# EAGLE board SampleHolder5oa (EAGLE 5.10)
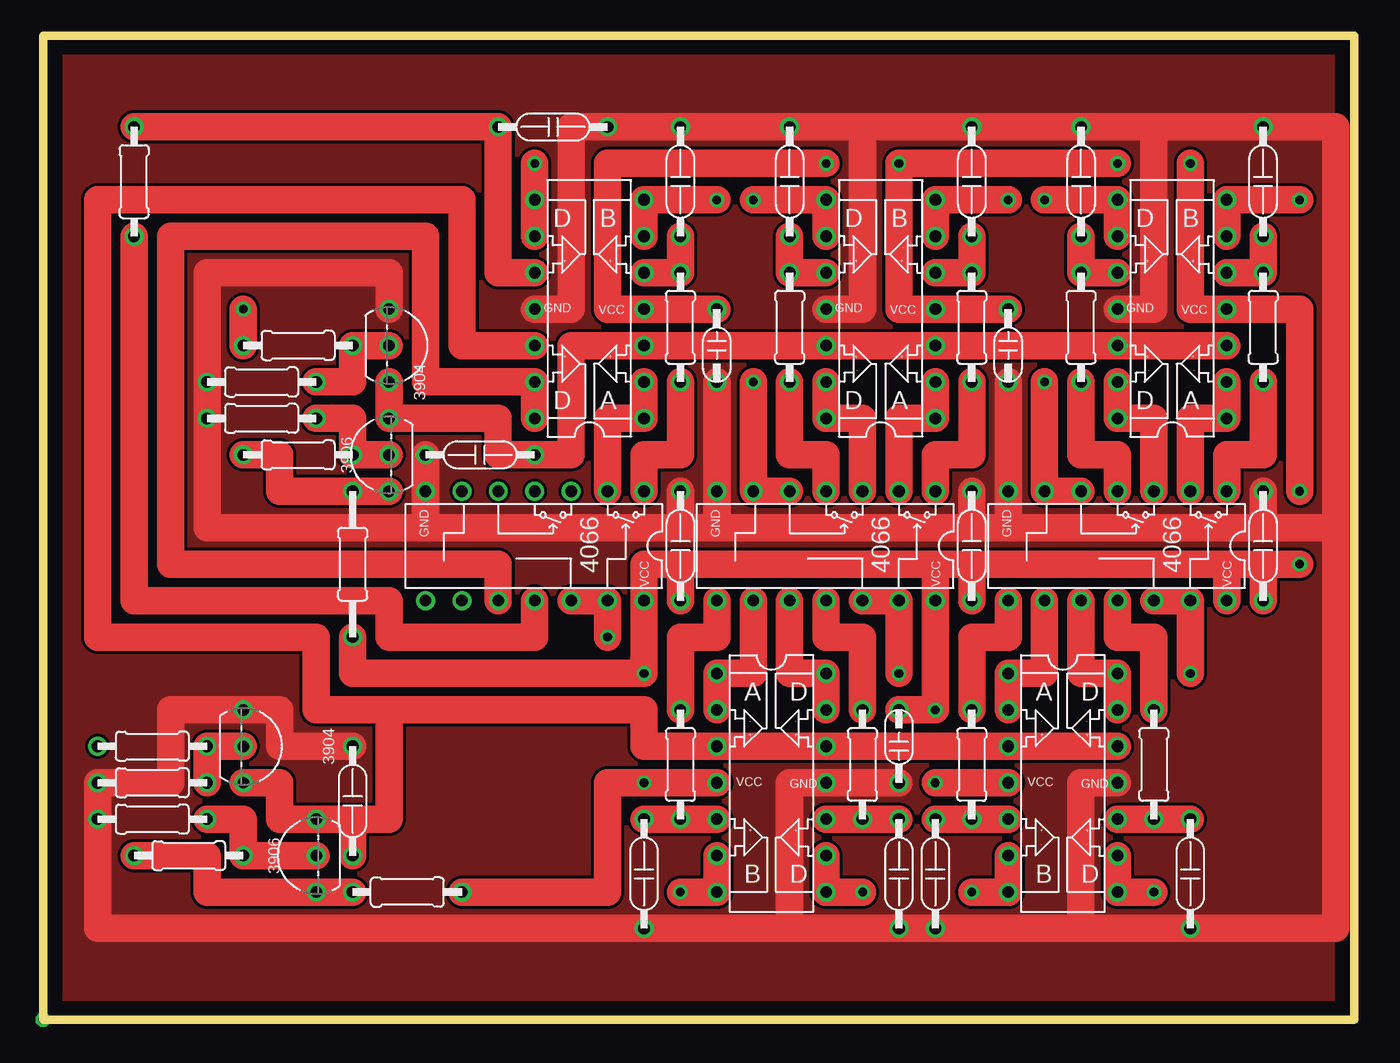
[diagram p0: board, top side]
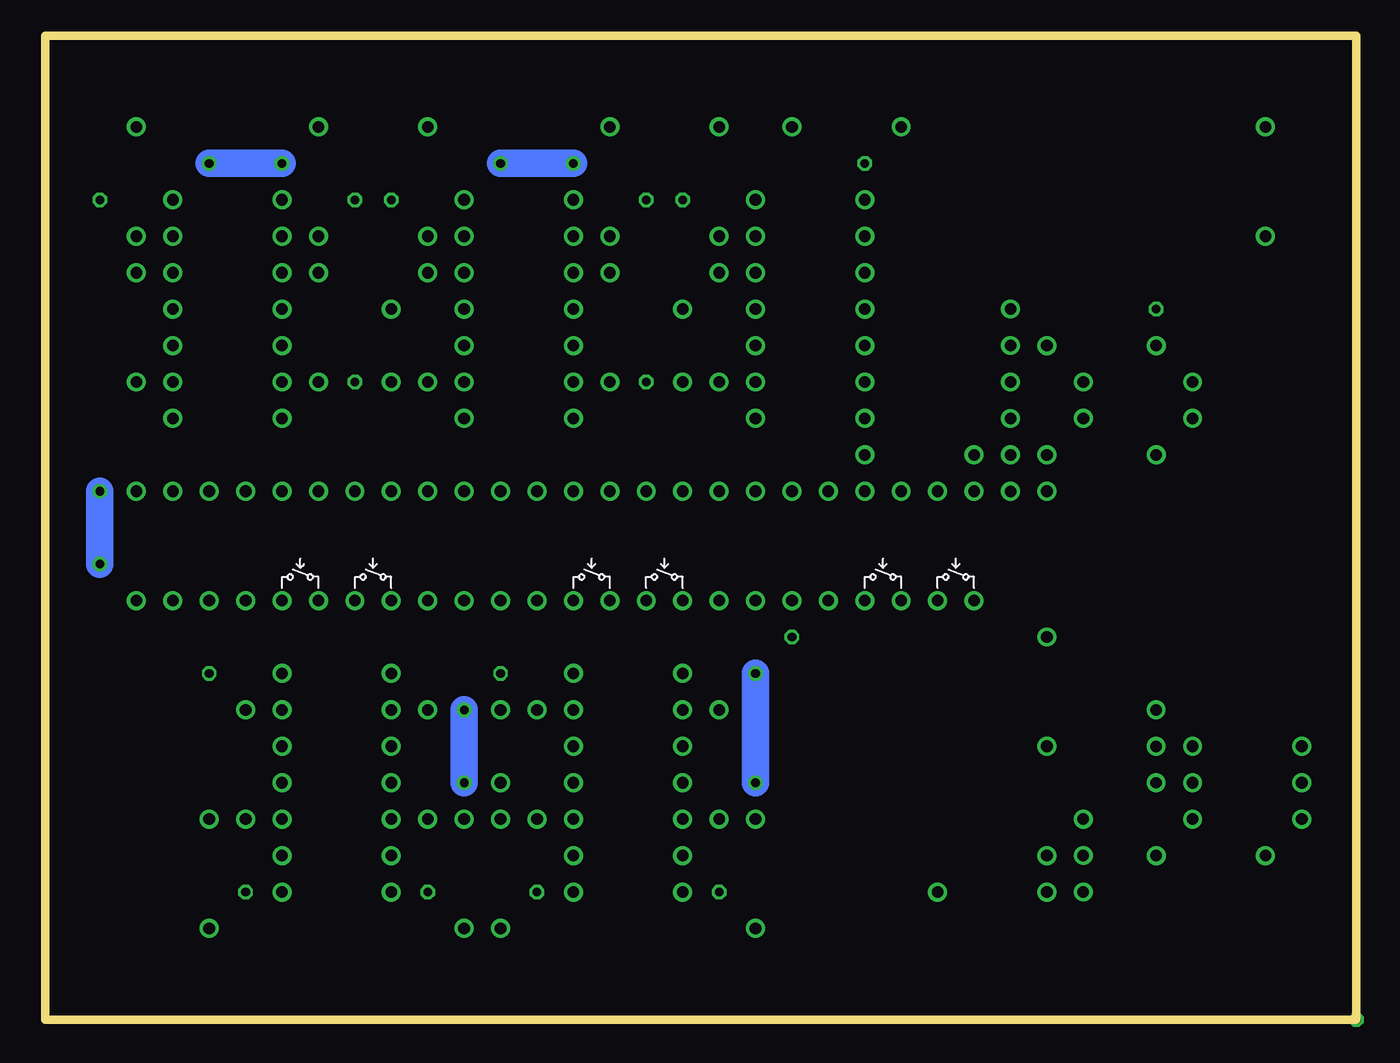
[diagram p1: board, bottom side, seen from below]

Size 91.44 x 68.58 mm. Coordinates in mm from the lower left corner, seen from the top.
Outline: 0,68.58 0,0 91.44,0 91.44,68.58 0,68.58
Copper layers (1*16): Top 0.035mm / dielectric 1.5mm / Bottom 0.035mm
Design rules "default": minimum track width 10mil, minimum drill 24mil, track to track 8mil, track to pad 8mil, pad to pad 8mil, via to via 8mil, smd to smd 8mil, copper to edge 40mil, drill to drill 8mil, minimum pad ring 10mil, minimum via ring 8mil, stop-mask expansion 4mil, vias tented up to drill 0mil, thermal gap 10mil

## Footprints (pad centres in the part's own frame; a part is rotated, then mirrored left to right if it is on the bottom)
SMALL-CAPACITOR = drill 0.813 round: IN1 0,0; IN2 5.08,0
RESISTOR = drill 0.813 round: IN1 -3.81,0; IN2 3.81,0
TRANSISTOR = drill 0.8 round: P$1 0,0; P$2 2.54,0; P$3 -2.54,0
LM324-QUAD-OPAMP = drill 0.813 round: AMINUS -3.81,5.08; AOUT -3.81,7.62; APLUS -3.81,2.54; BMINUS -3.81,-5.08; BOUT -3.81,-7.62; BPLUS -3.81,-2.54; CMINUS 3.81,5.08; COUT 3.81,7.62; CPLUS 3.81,2.54; DMINUS 3.81,-5.08; DOUT 3.81,-7.62; DPLUS 3.81,-2.54; GND 3.81,0; VCC -3.81,0
CAPACITOR = drill 0.813 round: IN1 -2.54,0; IN2 5.08,0
4066-QUAD-SW = drill 0.813 round: A1 -3.81,7.62; A2 -3.81,2.54; A3 3.81,-5.08; A4 3.81,0; B1 -3.81,5.08; B2 -3.81,0; B3 3.81,-7.62; B4 3.81,-2.54; C1 3.81,5.08; C2 -3.81,-2.54; C3 -3.81,-5.08; C4 3.81,2.54; GND -3.81,-7.62; VCC 3.81,7.62
RESISTOR-L2 = drill 0.813 round: IN1 -5.08,0; IN2 5.08,0

## Placement (x,y rotation side)
E$1  [SMALL-CAPACITOR]  59.69,16.51 90 top
E$2  [RESISTOR]  6.35,58.42 270 top
E$3  [TRANSISTOR]  19.05,11.43 90 top
E$4  [TRANSISTOR]  13.97,19.05 270 top
E$5  [LM324-QUAD-OPAMP]  38.1,49.53 180 top
E$6  2k  [RESISTOR]  10.16,11.43 180 top
E$7  [RESISTOR]  44.45,48.26 270 top
E$8  10k  [RESISTOR]  7.62,13.97 180 top
E$9  [CAPACITOR]  44.45,57.15 90 top
E$10  [4066-QUAD-SW]  54.61,33.02 270 top
E$11  [LM324-QUAD-OPAMP]  50.8,16.51 0 top
E$12  [RESISTOR]  57.15,17.78 90 top
E$13  [RESISTOR]  44.45,17.78 90 top
E$14  [CAPACITOR]  59.69,11.43 270 top
E$15  [4066-QUAD-SW]  34.29,33.02 270 top
E$16  [CAPACITOR]  36.83,62.23 180 top
E$17  [CAPACITOR]  41.91,11.43 270 top
E$18  [LM324-QUAD-OPAMP]  58.42,49.53 180 top
E$19  [RESISTOR]  52.07,48.26 270 top
E$20  [RESISTOR]  64.77,48.26 270 top
E$21  [CAPACITOR]  52.07,57.15 90 top
E$22  [CAPACITOR]  64.77,57.15 90 top
E$23  [4066-QUAD-SW]  74.93,33.02 270 top
E$24  [LM324-QUAD-OPAMP]  71.12,16.51 0 top
E$25  [RESISTOR]  77.47,17.78 90 top
E$26  [RESISTOR]  64.77,17.78 90 top
E$27  [CAPACITOR]  80.01,11.43 270 top
E$28  [CAPACITOR]  62.23,11.43 270 top
E$29  [LM324-QUAD-OPAMP]  78.74,49.53 180 top
E$30  [RESISTOR]  72.39,48.26 270 top
E$31  [RESISTOR]  85.09,48.26 270 top
E$32  [CAPACITOR]  72.39,57.15 90 top
E$33  [CAPACITOR]  85.09,57.15 90 top
E$34  [CAPACITOR]  64.77,31.75 90 top
E$35  [CAPACITOR]  44.45,31.75 90 top
E$36  [CAPACITOR]  85.09,31.75 90 top
E$37  [SMALL-CAPACITOR]  46.99,49.53 270 top
E$38  [SMALL-CAPACITOR]  67.31,49.53 270 top
E$39  2k  [RESISTOR]  25.4,8.89 0 top
E$40  2k  [RESISTOR-L2]  21.59,31.75 270 top
E$41  10k  [RESISTOR]  7.62,19.05 180 top
E$42  10k  [RESISTOR]  7.62,16.51 180 top
E$43  [TRANSISTOR]  24.13,39.37 90 top
E$44  [TRANSISTOR]  24.13,46.99 270 top
E$45  2k  [RESISTOR]  17.78,39.37 180 top
E$46  10k  [RESISTOR]  15.24,41.91 180 top
E$48  [CAPACITOR]  29.21,39.37 0 top
E$49  10k  [RESISTOR]  17.78,46.99 180 top
E$50  10k  [RESISTOR]  15.24,44.45 180 top
E$51  [CAPACITOR]  21.59,13.97 90 top

## Library data of the parts
E$1-E$46 E$48-E$51 = RussellLibrary

## Nets
GND: E$1.IN1 E$4.P$3 E$5.GND E$8.IN2 E$9.IN2 E$10.GND E$11.GND E$14.IN2 E$15.GND E$16.IN1 E$17.IN2 E$18.GND E$21.IN2 E$22.IN2 E$23.GND E$24.GND E$27.IN2 E$28.IN2 E$29.GND E$32.IN2 E$33.IN2 E$34.IN2 E$35.IN2 E$36.IN2 E$37.IN2 E$38.IN2 E$42.IN2 E$44.P$3 E$46.IN2 E$48.IN1 E$50.IN2 E$51.IN2
S$1: E$2.IN1 E$5.DPLUS E$16.IN2
S$2: E$5.CMINUS E$5.COUT E$15.B4
S$3: E$49.IN2
S$4: E$3.P$1 E$6.IN1 E$8.IN1
S$5: E$2.IN2 E$15.A4
S$8: E$5.AMINUS E$5.AOUT
S$9: E$5.DMINUS E$5.DOUT
S$10: E$3.P$2 E$4.P$2 E$5.CPLUS E$11.APLUS E$11.CPLUS E$24.APLUS E$24.CPLUS E$51.IN1
S$11: E$7.IN2
S$12: E$4.P$1 E$41.IN1 E$42.IN1
S$13: E$3.P$3 E$6.IN2 E$39.IN1
S$14: E$41.IN2
S$15: E$5.BPLUS E$9.IN1
S$16: E$5.BMINUS E$5.BOUT
S$17: E$10.C2 E$10.C3
S$18: E$10.C1 E$10.C4
S$19: E$1.IN2 E$5.VCC E$10.VCC E$11.VCC E$15.VCC E$18.VCC E$23.VCC E$24.VCC E$29.VCC E$34.IN1 E$35.IN1 E$36.IN1 E$37.IN1 E$38.IN1 E$39.IN2
S$22: E$10.A3 E$11.AMINUS E$11.AOUT
S$23: E$10.B4 E$11.CMINUS E$11.COUT
S$24: E$11.BMINUS E$11.BOUT
S$26: E$10.B3 E$13.IN2
S$27: E$10.A4 E$12.IN2
S$28: E$11.DPLUS E$12.IN1 E$14.IN1
S$29: E$43.P$1 E$45.IN1 E$46.IN1
S$30: E$11.BPLUS E$17.IN1
S$31: E$5.APLUS E$18.APLUS E$18.CPLUS E$29.APLUS E$29.CPLUS E$43.P$2 E$44.P$2
S$32: E$24.BMINUS E$24.BOUT
S$33: E$18.AMINUS E$18.AOUT
S$34: E$18.CMINUS E$18.COUT
S$35: E$44.P$1 E$49.IN1 E$50.IN1
S$36: E$20.IN2
S$37: E$19.IN2
S$38: E$43.P$3 E$45.IN2
S$39: E$15.C1 E$15.C4
S$40: E$18.DPLUS E$19.IN1 E$21.IN1
S$41: E$18.DMINUS E$18.DOUT
S$44: E$18.BPLUS E$22.IN1
S$46: E$18.BMINUS E$18.BOUT
S$47: E$11.DMINUS E$11.DOUT
S$48: E$23.C2 E$23.C3
S$49: E$23.C1 E$23.C4
S$51: E$24.DMINUS E$24.DOUT
S$53: E$23.A3 E$24.AMINUS E$24.AOUT
S$54: E$23.B4 E$24.CMINUS E$24.COUT
S$56: E$23.B3 E$26.IN2
S$57: E$23.A4 E$25.IN2
S$60: E$24.DPLUS E$25.IN1 E$27.IN1
S$62: E$24.BPLUS E$28.IN1
S$65: E$29.AMINUS E$29.AOUT
S$66: E$29.CMINUS E$29.COUT
S$68: E$31.IN2
S$69: E$30.IN2
S$70: E$29.DPLUS E$30.IN1 E$32.IN1
S$71: E$29.DMINUS E$29.DOUT
S$72: E$29.BPLUS E$33.IN1
S$73: E$29.BMINUS E$29.BOUT

## Tracks (layer width: path | path; a pad name or v marks a point on that pad's centre or on a via)
GND
  Top 1.93: E$1.IN1 E$11.GND 52.07,16.51 52.07,6.35 | E$5.GND 36.83,49.53 36.83,62.23 E$16.IN1 E$9.IN2 E$21.IN2 57.15,62.23 | 52.07,6.35 E$17.IN2 3.81,6.35 E$8.IN2 E$42.IN2 8.89,16.51 8.89,21.59 E$4.P$3 16.51,21.59 16.51,19.05 E$51.IN2 | 26.67,34.29 E$15.GND E$48.IN1 | E$18.GND 57.15,49.53 57.15,62.23 | 44.45,34.29 26.67,34.29 | 44.45,34.29 E$35.IN2 | E$37.IN2 E$10.GND 46.99,34.29 | 52.07,6.35 E$14.IN2 E$28.IN2 72.39,6.35 | E$24.GND 72.39,16.51 72.39,6.35 | 46.99,34.29 44.45,34.29 | 57.15,62.23 E$22.IN2 E$32.IN2 77.47,62.23 | 64.77,34.29 46.99,34.29 | 64.77,34.29 E$34.IN2 | E$38.IN2 E$23.GND 67.31,34.29 | 72.39,6.35 E$27.IN2 90.17,6.35 90.17,34.29 | 67.31,34.29 64.77,34.29 | E$29.GND 77.47,49.53 77.47,62.23 | 85.09,34.29 E$36.IN2 | 85.09,34.29 67.31,34.29 | 90.17,34.29 85.09,34.29 | 77.47,62.23 E$33.IN2 90.17,62.23 90.17,34.29 | 26.67,34.29 11.43,34.29 E$46.IN2 E$50.IN2 11.43,52.07 24.13,52.07 E$44.P$3
  pour Top: 91.44,68.58 91.44,0 0,0 0,68.58
S$1
  Top 1.93: E$5.DPLUS 31.75,52.07 E$16.IN2 E$2.IN1
S$2
  Top 1.93: E$5.COUT E$5.CMINUS 26.67,44.45 26.67,54.61 8.89,54.61 8.89,31.75 31.75,31.75 E$15.B4
S$3  (via drill 0.6)
  Top 1.93: v13.97,49.53 E$49.IN2
S$4
  Top 1.93: E$3.P$1 E$6.IN1 13.97,13.97 E$8.IN1
S$5
  Top 1.93: E$15.A4 34.29,26.67 24.13,26.67 24.13,29.21 6.35,29.21 E$2.IN2
S$8
  Top 1.93: E$5.AMINUS E$5.AOUT 39.37,41.91 39.37,36.83
S$9  (via drill 0.6)
  Top 1.93: E$5.DMINUS E$5.DOUT v34.29,59.69
S$10
  Top 1.93: E$4.P$2 16.51,16.51 16.51,13.97 E$3.P$2 21.59,13.97 | 21.59,13.97 24.13,13.97 24.13,21.59 | E$24.CPLUS E$24.APLUS E$11.CPLUS E$11.APLUS 41.91,19.05 41.91,21.59 24.13,21.59 | 24.13,21.59 19.05,21.59 19.05,26.67 3.81,26.67 3.81,57.15 29.21,57.15 29.21,46.99 E$5.CPLUS | 21.59,13.97 E$51.IN1
S$11
  Top 1.93: E$7.IN2 44.45,39.37 41.91,39.37 41.91,36.83
S$12
  Top 1.93: E$4.P$1 E$41.IN1 E$42.IN1
S$13
  Top 1.93: E$6.IN2 11.43,11.43 11.43,8.89 E$3.P$3 E$39.IN1
S$14  (via drill 0.6)
  other vias: 3.81,19.05
S$15
  Top 1.93: E$5.BPLUS 44.45,52.07 E$9.IN1
S$16  (via drill 0.6)
  Top 1.93: E$5.BMINUS E$5.BOUT v46.99,57.15
S$17  (via drill 0.6)
  Top 1.93: E$10.C2 E$10.C3 v49.53,44.45
S$18  (via drill 0.6)
  Top 1.93: E$10.C4 E$10.C1 v59.69,24.13
S$19  (via drill 0.6)
  Top 1.93: E$11.VCC v41.91,16.51 39.37,16.51 39.37,8.89 E$39.IN2 | v62.23,16.51 E$24.VCC | E$1.IN2 v62.23,21.59 E$10.VCC 62.23,31.75 | 44.45,31.75 41.91,31.75 E$15.VCC v41.91,24.13 21.59,24.13 21.59,26.67 | 44.45,31.75 E$35.IN1 | 62.23,31.75 44.45,31.75 | 64.77,31.75 62.23,31.75 | 64.77,31.75 E$34.IN1 | 82.55,31.75 E$23.VCC | 82.55,31.75 64.77,31.75 | 85.09,31.75 82.55,31.75 | 85.09,31.75 E$36.IN1 | E$37.IN1 E$5.VCC 39.37,49.53 39.37,59.69 v54.61,59.69 | v87.63,31.75 85.09,31.75 | E$38.IN1 E$18.VCC 59.69,49.53 v59.69,59.69 v74.93,59.69 | v87.63,36.83 87.63,49.53 E$29.VCC 80.01,49.53 v80.01,59.69
  Bottom 1.93: v41.91,24.13 v41.91,16.51 | v62.23,21.59 v62.23,16.51 | v87.63,36.83 v87.63,31.75 | v59.69,59.69 v54.61,59.69 | v80.01,59.69 v74.93,59.69
S$22
  Top 1.93: E$11.AMINUS E$11.AOUT 49.53,24.13 E$10.A3
S$23
  Top 1.93: E$11.CMINUS E$11.COUT 52.07,24.13 E$10.B4
S$24  (via drill 0.6)
  Top 1.93: E$11.BMINUS E$11.BOUT v44.45,8.89
S$25  (via drill 0.6)
  other vias: 0,0
S$26
  Top 1.93: E$13.IN2 44.45,26.67 46.99,26.67 E$10.B3
S$27
  Top 1.93: E$10.A4 54.61,26.67 57.15,26.67 E$12.IN2
S$28
  Top 1.93: E$12.IN1 E$11.DPLUS E$14.IN1
S$29
  Top 1.93: E$43.P$1 E$45.IN1 21.59,41.91 E$46.IN1
S$30
  Top 1.93: 44.45,13.97 E$11.BPLUS E$17.IN1
S$31
  Top 1.93: E$44.P$2 E$43.P$2 31.75,41.91 31.75,39.37 36.83,39.37 36.83,46.99 E$5.APLUS E$18.APLUS | E$29.APLUS E$29.CPLUS E$18.APLUS | E$18.APLUS E$18.CPLUS
S$32  (via drill 0.6)
  Top 1.93: E$24.BMINUS E$24.BOUT v64.77,8.89
S$33
  Top 1.93: E$18.AMINUS E$18.AOUT 59.69,41.91 59.69,36.83
S$34
  Top 1.93: E$18.CMINUS E$18.COUT 57.15,41.91 57.15,36.83
S$35
  Top 1.93: E$44.P$1 E$49.IN1 21.59,44.45 E$50.IN1
S$36
  Top 1.93: E$20.IN2 64.77,39.37 62.23,39.37 62.23,36.83
S$37
  Top 1.93: 54.61,36.83 54.61,39.37 52.07,39.37 E$19.IN2
S$38
  Top 1.93: E$43.P$3 16.51,36.83 16.51,39.37 E$45.IN2
S$39  (via drill 0.6)
  Top 1.93: E$15.C4 E$15.C1 v39.37,26.67
S$40
  Top 1.93: E$21.IN1 E$19.IN1 E$18.DPLUS
S$41  (via drill 0.6)
  Top 1.93: E$18.DMINUS E$18.DOUT v49.53,57.15
S$44
  Top 1.93: E$22.IN1 64.77,52.07 E$18.BPLUS
S$46  (via drill 0.6)
  Top 1.93: E$18.BMINUS E$18.BOUT v67.31,57.15
S$47  (via drill 0.6)
  Top 1.93: E$11.DMINUS E$11.DOUT v57.15,8.89
S$48  (via drill 0.6)
  Top 1.93: E$23.C2 E$23.C3 v69.85,44.45
S$49  (via drill 0.6)
  Top 1.93: E$23.C4 E$23.C1 v80.01,24.13
S$51  (via drill 0.6)
  Top 1.93: E$24.DMINUS E$24.DOUT v77.47,8.89
S$53
  Top 1.93: E$24.AMINUS E$24.AOUT 69.85,24.13 E$23.A3
S$54
  Top 1.93: E$24.CMINUS E$24.COUT 72.39,24.13 E$23.B4
S$56
  Top 1.93: E$26.IN2 64.77,26.67 67.31,26.67 E$23.B3
S$57
  Top 1.93: E$23.A4 74.93,26.67 77.47,26.67 E$25.IN2
S$60
  Top 1.93: E$24.DPLUS E$25.IN1 E$27.IN1
S$62
  Top 1.93: 64.77,13.97 E$24.BPLUS E$28.IN1
S$65
  Top 1.93: E$29.AMINUS E$29.AOUT 80.01,41.91 80.01,36.83
S$66
  Top 1.93: E$29.CMINUS E$29.COUT 77.47,41.91 77.47,36.83
S$68
  Top 1.93: E$31.IN2 85.09,39.37 82.55,39.37 82.55,36.83
S$69
  Top 1.93: 74.93,36.83 74.93,39.37 72.39,39.37 E$30.IN2
S$70
  Top 1.93: E$29.DPLUS E$30.IN1 E$32.IN1
S$71  (via drill 0.6)
  Top 1.93: E$29.DMINUS E$29.DOUT v69.85,57.15
S$72
  Top 1.93: E$33.IN1 85.09,52.07 E$29.BPLUS
S$73  (via drill 0.6)
  Top 1.93: E$29.BMINUS E$29.BOUT v87.63,57.15

## Text on the board
Unrouted: A | B | B | B | B | B | hst | vst | A | A | A | A
tPlace: 3904 | 3906 | 3904 | 3906